# Altium PCB PCB4.PcbDoc (part 3 of 7)
Units mm, origin at the board's own origin, x right, y up, seen from the top; angles counter-clockwise.
Board outline 234.9 x 198.3 mm, 4 copper layers (Top Layer, Signal Layer 2, Mid, Bottom Layer), stack 3.052 mm thick; 410 components, 320 nets, 2032 pads, 297 vias.
Unrouted connection lines stored in the file: 1.
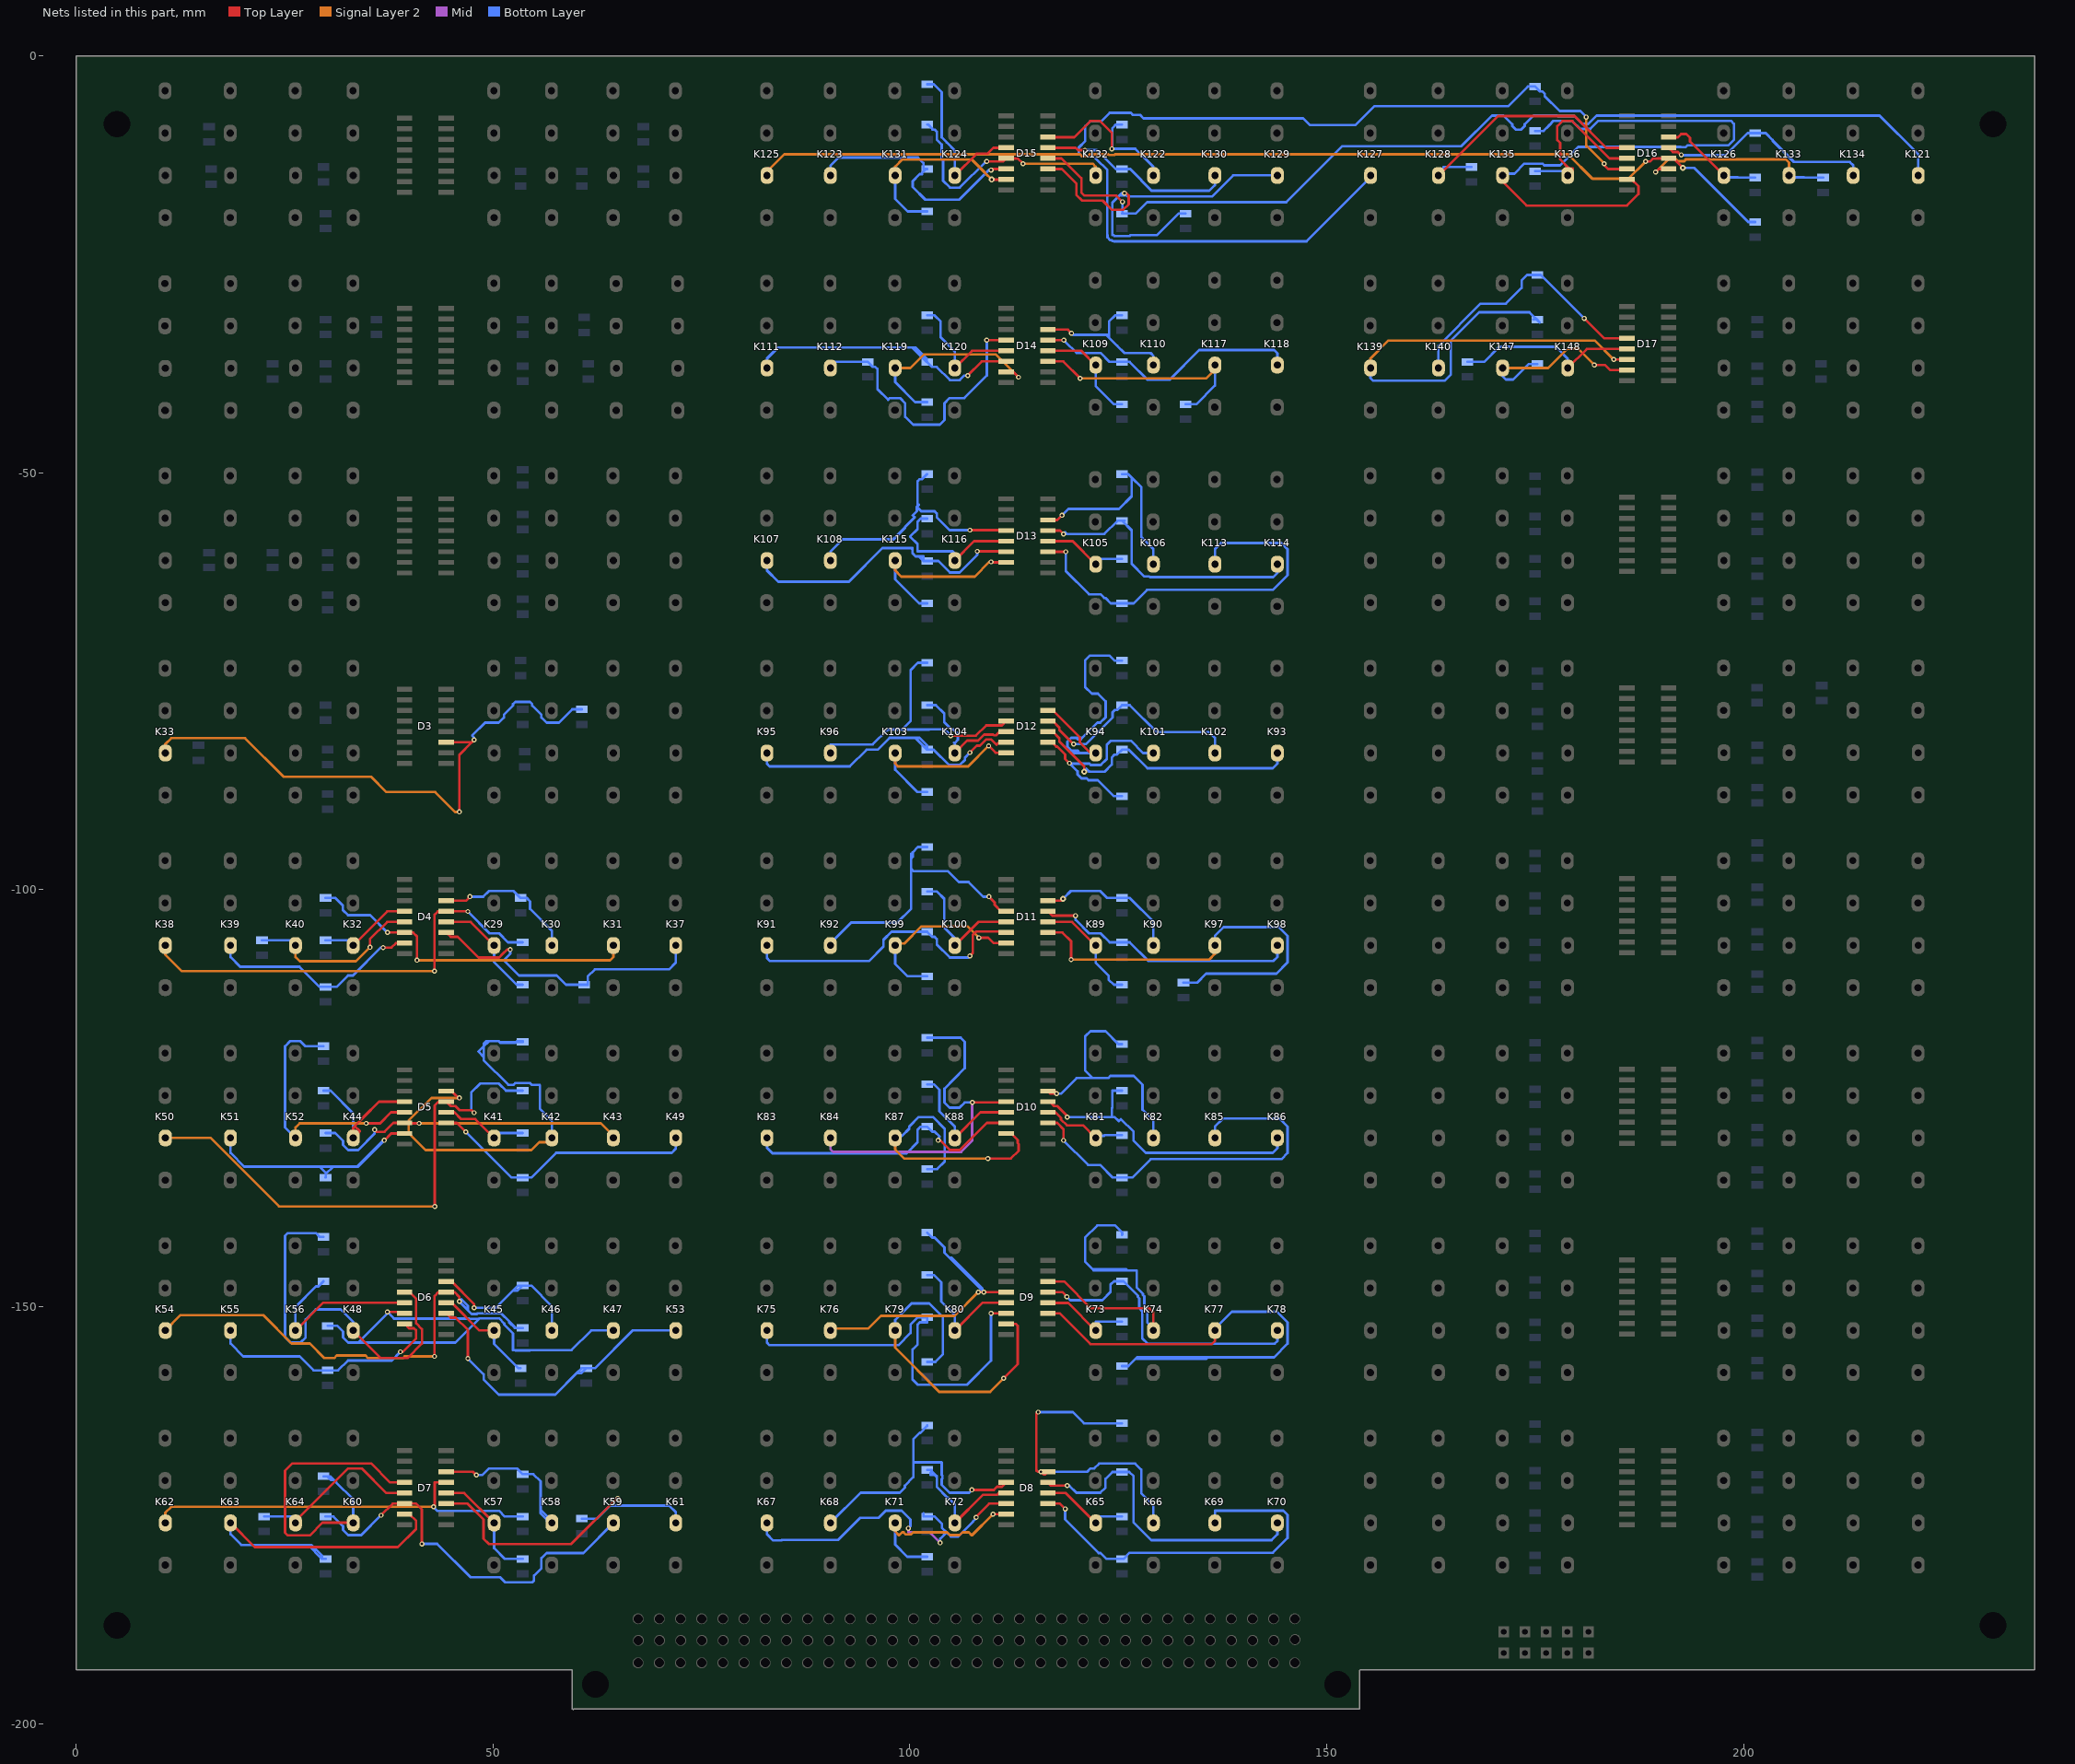
[diagram p5: the nets of this part, all layers, seen from the top]

## Via types
v1: diameter 0.6, hole 0.3, Top Layer to Bottom Layer, 292 vias
v2: diameter 0.7, hole 0.3, Top Layer to Bottom Layer, 5 vias

## Nets (pads, with @x,y where several pads share a name; then routed paths per layer and width w, separated by ;. In a path a pad name is that pad's centre, name@x,y a point inside that pad or via, vN(x,y) a via of type N, cw(c..) or ccw(c..) an arc to the next point about the centre after c; other vN are vias at no path point) (continued)
D3-7: D3.11 K33.3 VD32.A | length 70.5
  Top Layer w0.3: D3.11@44.407,-82.297 47.477,-82.297 ; v1(45.972,-90.66) 45.972,-83.802 47.477,-82.297 ; v1(47.75,-82.024) 47.477,-82.297
  Signal Layer 2 w0.3: K33.3@10.721,-83.592 10.721,-82.528 11.428,-81.821 20.267,-81.821 24.89,-86.444 35.405,-86.444 37.234,-88.273 43.076,-88.273 45.464,-90.66 v1(45.972,-90.66)
  Bottom Layer w0.3: v1(47.75,-82.024) 47.75,-81.759 47.507,-81.516 49.062,-79.962 50.69,-79.962 51.311,-79.341 51.311,-79.016 52.404,-77.924 52.404,-77.724 52.667,-77.461 54.44,-77.461 54.704,-77.724 54.704,-77.924 55.809,-79.029 55.809,-79.341 56.429,-79.962 57.902,-79.962 59.503,-78.36 VD32.A@60.666,-78.361
D4-0: D4.4 K32.3 VD33.A | length 11.8
  Top Layer w0.3: K32.3@33.248,-106.669 37.337,-102.58 D4.4@39.408,-102.58
  Bottom Layer w0.3: VD33.A@29.932,-106.047 33.248,-106.046 K32.3@33.248,-106.669
D4-1: D4.5 K40.3 VD34.A | length 21.9
  Top Layer w0.3: v1(35.253,-106.898) 35.253,-105.907 37.309,-103.85 D4.5@39.408,-103.85
  Signal Layer 2 w0.3: K40.3@26.327,-106.669 26.327,-108.059 26.835,-108.567 33.584,-108.567 v1(35.253,-106.898)
  Bottom Layer w0.3: VD34.A@22.312,-106.047 26.327,-106.046 K40.3@26.327,-106.669
D4-2: D4.6 K31.3 VD35.A | length 41.1
  Top Layer w0.3: v1(37.354,-105.12) D4.6@39.408,-105.12 40.416,-105.12 40.892,-105.596 v1(40.892,-108.44)
  Signal Layer 2 w0.3: v1(40.892,-108.44) 64.054,-108.44 64.435,-108.059 K31.3@64.435,-106.669
  Bottom Layer w0.3: VD35.A@29.932,-100.967 31.094,-100.966 31.996,-101.869 31.996,-102.419 32.617,-103.039 35.273,-103.039 v1(37.354,-105.12)
D4-3: D4.7 K39.3 VD36.A | length 25.9
  Top Layer w0.3: v1(36.828,-106.916) 37.844,-106.916 38.37,-106.39 D4.7@39.408,-106.39
  Bottom Layer w0.3: K39.3@18.531,-106.669 18.531,-108.076 19.683,-109.228 26.801,-109.228 29.208,-111.634 VD36.A@29.932,-111.635 31.257,-111.634 32.617,-110.274 33.216,-110.274 36.574,-106.916 v1(36.828,-106.916)
D4-4: D4.14 K30.3 VD37.A | length 17.4
  Top Layer w0.3: D4.14@44.407,-101.31 46.752,-101.31 v1(47.242,-100.82)
  Bottom Layer w0.3: v1(47.242,-100.82) 48.827,-100.82 49.508,-100.139 52.472,-100.139 VD37.A@53.3,-100.967 54.03,-100.966 54.455,-101.392 54.455,-102.279 57.061,-104.884 K30.3@57.061,-106.669
D4-5: D4.13 K38.3 VD38.A | length 54.8
  Top Layer w0.3: v1(43,-109.761) 43,-102.979 43.399,-102.58 D4.13@44.407,-102.58 46.969,-102.58 v1(46.988,-102.598)
  Signal Layer 2 w0.3: K38.3@10.721,-106.669 10.721,-107.785 12.698,-109.761 v1(43,-109.761)
  Bottom Layer w0.3: v1(46.988,-102.598) 49.608,-105.219 50.73,-105.219 ; VD38.A@53.554,-106.301 51.811,-106.3 ; 50.73,-105.219 51.811,-106.3 ; 50.73,-105.219 51.811,-106.3
D4-6: D4.12 K29.3 VD39.A | length 13.4
  Top Layer w0.3: D4.12@44.407,-103.85 47.32,-103.85 K29.3@50.139,-106.669
  Bottom Layer w0.3: K29.3@50.139,-106.669 50.139,-108.671 52.849,-111.38 VD39.A@53.554,-111.381
D4-7: D4.11 K37.3 VD40.A | length 39.1
  Top Layer w0.3: D4.11@44.407,-105.12 44.927,-105.64 45.783,-105.64 48.261,-108.119 50.73,-108.119 51.159,-107.691 51.679,-107.171 v1(52.068,-107.171)
  Bottom Layer w0.3: v1(52.068,-107.171) 52.068,-107.679 51.371,-108.375 ; K37.3@71.92,-106.669 71.92,-108.731 71.118,-109.533 62.228,-109.533 61.364,-110.396 61.364,-111.38 VD40.A@60.92,-111.381 58.753,-111.38 57.647,-110.274 53.139,-110.274 ; 51.371,-108.506 53.139,-110.274 ; 51.371,-108.506 53.139,-110.274 ; 51.371,-108.506 51.306,-108.44 51.371,-108.375 ; 51.371,-108.506 51.371,-108.375
D5-0: D5.4 K44.3 VD41.A | length 18.4
  Top Layer w0.3: D5.4@39.408,-125.404 37.591,-125.404 36.329,-125.404 34.485,-127.248 33.415,-128.319 ; 33.415,-128.319 33.248,-128.485 K44.3@33.248,-129.747 34.046,-128.95 33.415,-128.319
  Bottom Layer w0.3: VD41.A@29.678,-124.081 30.522,-124.08 33.248,-126.807 K44.3@33.248,-129.747
D5-1: D5.5 K52.3 VD42.A | length 31.7
  Top Layer w0.3: v1(34.796,-127.998) 36.468,-127.998 37.793,-126.674 D5.5@39.408,-126.674
  Signal Layer 2 w0.3: K52.3@26.327,-129.747 26.327,-128.492 26.82,-127.998 v1(34.796,-127.998)
  Bottom Layer w0.3: K52.3@26.327,-129.747 25.075,-128.495 25.075,-118.758 25.695,-118.137 26.878,-118.137 27.487,-118.746 VD42.A@29.678,-118.747
D5-2: D5.6 K43.3 VD43.A | length 38.3
  Top Layer w0.3: v1(35.812,-128.761) 36.066,-129.014 36.995,-129.014 38.065,-127.944 D5.6@39.408,-127.944 39.462,-127.999 v1(41.146,-127.999)
  Signal Layer 2 w0.3: v1(41.146,-127.999) 62.936,-127.998 64.435,-129.497 K43.3@64.435,-129.747
  Bottom Layer w0.3: VD43.A@29.932,-129.161 31.094,-129.16 32.036,-130.103 32.036,-130.576 32.657,-131.197 33.839,-131.197 35.812,-129.225 v1(35.812,-128.761)
D5-3: D5.7 K51.3 VD44.A | length 32.4
  Top Layer w0.3: v1(36.979,-130.03) 37.795,-129.214 D5.7@39.408,-129.214
  Bottom Layer w0.3: K51.3@18.531,-129.747 18.531,-131.554 20.157,-133.18 29.208,-133.18 ; VD44.A@29.932,-134.495 29.944,-134.494 VD44.A@29.944,-134.094 ; v1@36.828,-130.03 33.678,-133.18 ; v1(36.979,-130.03) 33.829,-133.18 33.678,-133.18 ; 29.208,-133.18 29.944,-133.917 VD44.A@29.944,-134.094 ; 29.208,-133.18 30.859,-133.18 ; VD44.A@29.944,-134.094 30.859,-133.18 ; 30.859,-133.18 33.678,-133.18
D5-4: D5.14 K42.3 VD45.A | length 57.2
  Top Layer w0.3: D5.14@44.407,-124.134 45.032,-124.134 45.972,-125.074 v1(45.972,-124.95)
  Signal Layer 2 w0.3: v1(45.972,-124.95) 42.619,-124.95 39.888,-127.682 39.888,-129.179 41.908,-131.199 54.608,-131.199 55.547,-130.259 57.061,-130.259 K42.3@57.061,-129.747
  Bottom Layer w0.3: K42.3@57.061,-129.747 57.061,-127.658 55.624,-126.22 55.624,-123.427 55.577,-123.38 54.64,-123.38 54.44,-123.181 52.667,-123.181 52.467,-123.38 51.851,-123.38 48.887,-120.416 48.887,-120.017 ; 48.887,-120.017 48.258,-119.387 48.887,-118.758 ; 48.887,-120.017 48.887,-118.758 ; 48.887,-118.758 48.887,-118.46 49.21,-118.137 49.508,-118.137 ; 48.887,-118.758 49.508,-118.137 ; 49.508,-118.137 50.69,-118.137 50.792,-118.238 ; 50.792,-118.238 50.923,-118.37 52.685,-118.37 52.816,-118.238 ; 50.792,-118.238 52.816,-118.238 ; 52.816,-118.238 52.916,-118.138 53.554,-118.138 VD45.A@53.554,-118.239 52.816,-118.238
D5-5: D5.13 K50.3 VD46.A | length 62.9
  Top Layer w0.3: v1(43.025,-137.955) 43.025,-125.839 43.461,-125.404 D5.13@44.407,-125.404 44.927,-125.924 45.519,-125.924 45.972,-126.377 45.972,-126.412 47.433,-126.412 v1(47.75,-126.728)
  Signal Layer 2 w0.3: K50.3@10.721,-129.747 10.721,-129.726 16.101,-129.726 24.331,-137.955 v1(43.025,-137.955)
  Bottom Layer w0.3: v1(47.75,-126.728) 47.398,-126.377 47.398,-124.286 48.467,-123.217 50.69,-123.217 51.554,-124.08 VD46.A@53.554,-124.081
D5-6: D5.12 K41.3 VD47.A | length 11
  Top Layer w0.3: D5.12@44.407,-126.674 45.385,-126.674 46.19,-127.479 47.87,-127.479 K41.3@50.139,-129.747
  Bottom Layer w0.3: K41.3@50.139,-129.747 50.139,-129.16 VD47.A@53.554,-129.161
D5-7: D5.11 K49.3 VD48.A | length 33
  Top Layer w0.3: D5.11@44.407,-127.944 45.663,-127.944 v1(46.734,-129.014)
  Bottom Layer w0.3: v1(46.734,-129.014) 52.214,-134.494 VD48.A@53.554,-134.495 54.608,-134.494 57.573,-131.529 71.435,-131.529 71.92,-131.045 K49.3@71.92,-129.747
D6-0: D6.4 K48.3 VD49.A | length 47.8
  Top Layer w0.3: K48.3@33.248,-152.825 36.561,-156.137 39.763,-156.137 41.492,-154.409 41.492,-152.682 40.783,-151.973 40.783,-149.011 39.999,-148.228 D6.4@39.408,-148.228
  Bottom Layer w0.3: VD49.A@29.678,-141.607 29.233,-141.606 28.782,-141.156 25.398,-141.156 25.067,-141.486 25.067,-153.607 25.735,-154.275 26.918,-154.275 27.539,-153.654 27.539,-151.511 28.75,-150.3 31.748,-150.3 33.248,-151.8 K48.3@33.248,-152.825
D6-1: D6.5 K56.3 VD50.A | length 21.9
  Top Layer w0.3: K56.3@26.327,-152.825 29.654,-149.498 D6.5@39.408,-149.498
  Bottom Layer w0.3: K56.3@26.327,-152.825 26.327,-150.005 28.791,-147.54 29.078,-147.54 VD50.A@29.678,-146.941
D6-2: D6.6 K47.3 VD51.A | length 68.3
  Top Layer w0.3: v1(37.336,-150.604) 39.244,-150.604 D6.6@39.408,-150.768
  Bottom Layer w0.3: VD51.A@30.186,-152.275 31.348,-152.274 32.036,-152.963 32.036,-153.654 32.657,-154.275 33.839,-154.275 ; K47.3@64.435,-152.825 61.785,-152.825 59.434,-155.176 54.492,-155.176 54.44,-155.229 52.667,-155.229 52.615,-155.176 52.403,-155.176 52.403,-153.181 51.351,-152.128 51.351,-151.995 50.73,-151.375 48.38,-151.375 ; 33.839,-154.275 37.336,-150.779 v1(37.336,-150.604) 38.098,-151.366 ; 33.839,-154.275 45.48,-154.275 48.309,-151.447 ; 38.098,-151.366 47.11,-151.366 47.19,-151.447 ; 38.098,-151.366 38.178,-151.447 47.19,-151.447 ; 47.19,-151.447 48.309,-151.447 ; 48.309,-151.447 48.38,-151.375 ; 48.309,-151.447 48.38,-151.375
D6-3: D6.7 K55.3 VD52.A | length 29.4
  Top Layer w0.3: v1(38.903,-155.387) 39.189,-155.387 40.783,-153.794 40.783,-152.821 40.519,-152.558 39.927,-152.558 D6.7@39.408,-152.038
  Bottom Layer w0.3: K55.3@18.531,-152.825 18.531,-154.414 20.055,-155.938 26.826,-155.938 28.496,-157.608 VD52.A@30.186,-157.609 31.438,-157.608 32.617,-156.43 37.86,-156.43 v1(38.903,-155.387)
D6-4: D6.14 K46.3 VD53.A | length 23.5
  Top Layer w0.3: D6.14@44.407,-146.958 45.032,-146.958 47.75,-149.675 v1(47.75,-150.096)
  Bottom Layer w0.3: v1(47.75,-150.096) 50.356,-150.096 ; K46.3@57.061,-152.825 57.061,-149.901 54.608,-147.448 VD53.A@53.554,-147.449 ; 50.356,-150.096 52.404,-148.048 ; 50.356,-150.096 52.404,-148.048 ; 52.404,-148.048 52.954,-148.048 VD53.A@53.554,-147.449 ; 52.404,-148.048 53.004,-147.448 VD53.A@53.554,-147.449
D6-5: D6.13 K54.3 VD54.A | length 59.5
  Top Layer w0.3: v1(43,-155.938) 43,-148.699 43.471,-148.228 D6.13@44.407,-148.228 45.373,-148.228 45.972,-148.826 v1(45.972,-149.334)
  Signal Layer 2 w0.3: K54.3@10.721,-152.825 10.721,-152.814 12.55,-150.985 22.446,-150.985 25.853,-154.393 28.047,-154.393 29.792,-156.137 30.954,-156.137 31.262,-155.83 34.709,-155.83 35.016,-156.137 39.213,-156.137 39.412,-155.938 v1(43,-155.938)
  Bottom Layer w0.3: VD54.A@53.554,-152.529 52.733,-152.528 ; 47.439,-150.847 47,-150.407 47,-149.854 46.226,-149.08 v1(45.972,-149.334) 45.972,-149.379 47.439,-150.847 ; 47.439,-150.847 48.06,-150.847 48.132,-150.775 50.979,-150.775 51.951,-151.747 ; 51.951,-151.747 51.951,-151.88 52.6,-152.528 52.733,-152.528 ; 51.951,-151.747 52.733,-152.528
D6-6: D6.12 K45.3 VD55.A | length 13.1
  Top Layer w0.3: D6.12@44.407,-149.498 45.032,-149.498 48.359,-152.825 K45.3@50.139,-152.825
  Bottom Layer w0.3: K45.3@50.139,-152.825 50.139,-154.452 53.041,-157.354 VD55.A@53.3,-157.355
D6-7: D6.11 K53.3 VD56.A | length 38.5
  Top Layer w0.3: D6.11@44.407,-150.768 44.927,-151.288 45.519,-151.288 46.988,-152.756 v1(46.988,-156.192)
  Bottom Layer w0.3: v1(46.988,-156.192) 48.887,-158.092 48.887,-158.709 50.689,-160.511 57.467,-160.511 60.023,-157.954 ; K53.3@71.92,-152.825 71.92,-152.814 66.774,-152.814 62.234,-157.354 VD56.A@61.174,-157.355 ; 60.023,-157.954 60.573,-157.954 VD56.A@61.174,-157.355 ; 60.023,-157.954 60.623,-157.354 VD56.A@61.174,-157.355
D7-0: D7.4 K60.3 VD57.A | length 40.5
  Top Layer w0.3: K60.3@33.248,-175.902 33.248,-175.877 29.563,-175.877 28.039,-177.401 25.398,-177.401 25.067,-177.071 25.067,-169.654 25.956,-168.765 35.38,-168.765 37.666,-171.051 D7.4@39.408,-171.051
  Bottom Layer w0.3: VD57.A@29.678,-170.309 VD57.A@30.227,-170.308 ; K60.3@33.248,-175.902 33.248,-174.546 33.248,-173.079 31.214,-171.045 30.932,-170.762 ; VD57.A@30.227,-170.308 30.227,-170.411 30.579,-170.762 30.932,-170.762 ; VD57.A@30.227,-170.308 30.478,-170.308 30.932,-170.762
D7-1: D7.5 K64.3 VD58.A | length 21.7
  Top Layer w0.3: K64.3@26.327,-175.902 26.327,-175.663 32.617,-169.373 34.259,-169.373 37.209,-172.321 D7.5@39.408,-172.321
  Bottom Layer w0.3: VD58.A@22.566,-175.135 24.356,-175.134 24.375,-175.115 26.327,-175.115 K64.3@26.327,-175.902
D7-2: D7.6 K59.3 VD59.A | length 47.6
  Top Layer w0.3: v1(36.574,-174.988) 37.971,-173.591 D7.6@39.408,-173.591 40.783,-173.591 41.476,-174.285 v1(41.476,-178.417)
  Bottom Layer w0.3: VD59.A@29.932,-175.135 30.878,-175.134 32.036,-176.293 32.036,-176.732 32.657,-177.352 34.21,-177.352 v1(36.574,-174.988) ; v1(41.476,-178.417) 43.305,-178.417 47.3,-182.413 50.73,-182.413 50.856,-182.413 51.468,-183.025 54.7,-183.025 54.925,-182.799 54.925,-182.214 55.809,-181.331 55.809,-180.128 56.429,-179.508 60.83,-179.508 K59.3@64.435,-175.902
D7-3: D7.7 K63.3 VD60.A | length 43.6
  Top Layer w0.3: K63.3@18.531,-175.902 21.427,-178.798 38.602,-178.798 40.783,-176.618 40.783,-175.645 39.999,-174.861 D7.7@39.408,-174.861
  Bottom Layer w0.3: K63.3@18.531,-175.902 18.531,-177.274 19.801,-178.544 27.817,-178.544 ; VD60.A@29.932,-180.215 VD60.A@29.487,-180.214 ; 27.817,-178.544 VD60.A@29.487,-180.214 ; 27.817,-178.544 28.217,-178.544 29.487,-179.814 VD60.A@29.487,-180.214
D7-4: D7.14 K58.3 VD61.A | length 20.2
  Top Layer w0.3: D7.14@44.407,-169.781 47.623,-169.781 v1(48.004,-170.162)
  Bottom Layer w0.3: v1(48.004,-170.162) 48.718,-170.162 49.508,-169.373 52.871,-169.373 VD61.A@53.554,-170.055 54.855,-170.054 55.725,-170.924 55.725,-174.339 ; K58.3@57.061,-175.902 K58.3@57.061,-175.674 ; 55.725,-174.339 K58.3@57.061,-175.674 ; 55.725,-174.339 55.725,-174.75 56.449,-175.473 56.449,-175.674 K58.3@57.061,-175.674
D7-5: D7.13 K62.3 VD62.A | length 49.2
  Top Layer w0.3: v1(42.873,-173.972) 43.025,-173.82 43.025,-171.051 D7.13@44.407,-171.051
  Signal Layer 2 w0.3: K62.3@10.721,-175.902 10.721,-174.679 11.428,-173.972 v1(42.873,-173.972)
  Bottom Layer w0.3: v1(42.873,-173.972) 43.369,-174.469 47.044,-174.469 47.06,-174.453 50.73,-174.453 51.412,-175.134 VD62.A@53.554,-175.135
D7-6: D7.12 K57.3 VD63.A | length 14.2
  Top Layer w0.3: D7.12@44.407,-172.321 46.558,-172.321 K57.3@50.139,-175.902
  Bottom Layer w0.3: K57.3@50.139,-175.902 50.139,-178.921 51.433,-180.214 VD63.A@53.554,-180.215
D7-7: D7.11 K61.3 VD64.A | length 43.2
  Top Layer w0.3: D7.11@44.407,-173.591 46.962,-173.591 48.867,-175.496 48.867,-177.782 49.528,-178.443 59.383,-178.443 64.869,-172.957 v1(64.971,-172.957)
  Bottom Layer w0.3: VD64.A@60.666,-175.389 62.437,-175.388 ; v1(64.971,-172.957) 64.869,-172.957 62.437,-175.388 ; K61.3@71.92,-175.902 71.92,-174.622 71.118,-173.82 64.05,-173.82 62.482,-175.388 62.437,-175.388
D8-0: D8.4 K68.3 VD65.A | length 34.1
  Top Layer w0.3: v1(107.44,-171.94) 110.063,-171.94 110.432,-171.571 111.023,-171.571 D8.4@111.543,-171.051
  Bottom Layer w0.3: K68.3@90.462,-175.902 94.092,-172.272 98.774,-172.272 99.395,-171.652 99.395,-171.433 100.404,-170.424 100.404,-168.638 ; VD65.A@102.068,-164.213 102.068,-164.297 101.252,-165.113 101.181,-165.113 100.404,-165.89 100.404,-168.638 ; v1(107.44,-171.94) 107.108,-172.272 104.753,-172.272 103.818,-171.337 103.818,-170.659 103.88,-170.597 103.88,-170.224 103.818,-170.162 103.818,-168.638 100.404,-168.638
D8-1: D8.5 K72.3 VD66.A | length 17.3
  Top Layer w0.3: K72.3@105.384,-175.902 108.746,-172.54 110.417,-172.54 110.636,-172.321 D8.5@111.543,-172.321
  Bottom Layer w0.3: VD66.A@102.068,-169.547 VD66.A@102.477,-169.546 ; K72.3@105.384,-175.902 105.384,-173.668 104.589,-172.872 104.504,-172.872 103.218,-171.586 103.218,-170.41 ; VD66.A@102.477,-169.546 VD66.A@102.618,-169.687 ; VD66.A@102.477,-169.546 102.618,-169.546 VD66.A@102.618,-169.687 ; VD66.A@102.618,-169.687 103.218,-170.287 103.218,-170.41 ; VD66.A@102.618,-169.687 102.618,-169.734 102.477,-169.875 102.477,-170.146 102.954,-170.146 103.218,-170.41
D8-2: D8.6 K67.3 VD67.A | length 41.6
  Top Layer w0.3: v1@107.948,-175.38 v1(107.948,-175.243) ; v1@107.948,-175.152 109.509,-173.591 D8.6@111.543,-173.591
  Mid w0.3: v1(99.82,-176.539) 99.82,-177.021 102.36,-177.021 v1(103.63,-178.291)
  Bottom Layer w0.3: K67.3@82.857,-175.902 82.857,-177.274 83.568,-177.986 84.61,-177.986 ; 84.661,-177.935 91.412,-177.935 94.054,-175.293 96.238,-175.293 97.102,-174.43 99.007,-174.43 100.058,-175.481 100.058,-176.269 100.074,-176.285 v1(99.82,-176.539) ; VD67.A@101.623,-174.773 101.623,-175.134 102.963,-175.134 103.833,-176.004 103.833,-176.462 104.392,-177.02 ; v1(103.63,-178.291) 103.63,-177.783 104.392,-177.02 ; v1(107.948,-175.243) 107.948,-175.353 107.577,-175.723 107.577,-175.751 105.799,-177.528 104.9,-177.528 104.392,-177.02
D8-3: D8.7 K71.3 VD68.A | length 23.4
  Top Layer w0.3: v1(109.954,-174.861) D8.7@111.543,-174.861
  Signal Layer 2 w0.3: K71.3@98.223,-175.902 98.223,-176.923 98.689,-177.388 99.056,-177.021 99.241,-177.021 99.509,-177.289 100.13,-177.289 100.398,-177.021 104.461,-177.021 104.793,-177.352 105.975,-177.352 106.307,-177.021 107.06,-177.021 107.428,-177.388 v1(109.954,-174.861)
  Bottom Layer w0.3: K71.3@98.223,-175.902 98.223,-178.491 99.693,-179.96 VD68.A@102.068,-179.961
D8-4: D8.14 K66.3 VD69.A | length 39.9
  Top Layer w0.3: v1(115.364,-162.619) 115.161,-162.822 115.161,-169.604 115.339,-169.781 v1(115.719,-169.781) ; v1(115.719,-169.781) D8.14@116.543,-169.781 116.243,-170.082 116.02,-170.082 v1(115.719,-169.781)
  Bottom Layer w0.3: v1(115.364,-162.619) 119.536,-162.619 120.876,-163.958 VD69.A@125.435,-163.959 ; v1(115.719,-169.781) 121.235,-169.781 121.644,-169.373 122.098,-169.373 122.68,-168.791 126.998,-168.791 127.734,-169.527 127.734,-172.358 129.197,-173.82 K66.3@129.197,-175.902
D8-5: D8.13 K70.3 VD70.A | length 39.1
  Top Layer w0.3: D8.13@116.543,-171.051 116.924,-171.432 v1(118.87,-171.432)
  Bottom Layer w0.3: v1(118.87,-171.432) 119.124,-171.432 119.964,-172.272 122.826,-172.272 123.447,-171.652 123.447,-170.627 ; K70.3@144.056,-175.902 144.056,-177.274 143.37,-177.96 128.928,-177.96 126.82,-175.852 126.82,-170.315 126.305,-169.8 VD70.A@125.436,-169.801 124.273,-169.8 ; 123.447,-170.627 124.273,-169.8 ; 123.447,-170.627 124.273,-169.8
D8-6: D8.12 K65.3 VD71.A | length 11.2
  Top Layer w0.3: D8.12@116.543,-172.321 118.694,-172.321 K65.3@122.275,-175.902
  Bottom Layer w0.3: K65.3@122.275,-175.902 122.275,-175.115 123.854,-175.115 123.873,-175.134 VD71.A@125.436,-175.135
D8-7: D8.11 K69.3 VD72.A | length 46.4
  Top Layer w0.3: D8.11@116.543,-173.591 117.981,-173.591 v1(118.616,-174.226)
  Bottom Layer w0.3: v1(118.616,-174.226) 118.616,-175.497 122.627,-179.507 122.861,-179.507 123.568,-180.214 125.632,-180.214 126.363,-179.484 143.508,-179.484 145.286,-177.706 145.286,-174.938 144.778,-174.43 136.571,-174.43 K69.3@136.571,-175.902
D9-0: D9.4 K76.3 VD73.A | length 39.2
  Top Layer w0.3: v1(108.202,-148.228) v1(108.866,-148.228) D9.4@111.543,-148.228
  Signal Layer 2 w0.3: K76.3@90.462,-152.825 90.462,-152.586 95.019,-152.586 96.518,-151.087 105.342,-151.087 v1(108.202,-148.228)
  Bottom Layer w0.3: K76.3@90.462,-152.825 K76.3@90.462,-152.586 ; VD73.A@102.068,-141.099 102.668,-141.698 102.954,-141.698 104.132,-142.877 104.132,-143.494 104.753,-144.115 ; v1@108.71,-148.064 108.71,-147.81 105.014,-144.115 104.753,-144.115 ; v1(108.866,-148.228) 104.753,-144.115
D9-1: D9.5 K80.3 VD74.A | length 16
  Top Layer w0.3: K80.3@105.384,-152.825 108.711,-149.498 D9.5@111.543,-149.498
  Bottom Layer w0.3: VD74.A@102.067,-146.179 102.868,-146.178 103.757,-147.067 103.757,-149.358 105.384,-150.985 K80.3@105.384,-152.825
D9-2: D9.6 K75.3 VD75.A | length 50
  Top Layer w0.3: v1(109.726,-150.768) D9.6@111.543,-150.768
  Bottom Layer w0.3: K75.3@82.857,-152.825 82.857,-154.267 83.183,-154.592 98.626,-154.592 100.074,-153.144 100.074,-152.147 100.963,-151.258 VD75.A@102.068,-151.259 102.068,-151.858 101.181,-151.858 100.918,-152.122 100.918,-154.491 100.318,-155.091 100.318,-158.723 100.93,-159.335 106.837,-159.335 109.726,-156.446 v1(109.726,-150.768) v1@109.726,-150.604
D9-3: D9.7 K79.3 VD76.A | length 41.6
  Top Layer w0.3: v1(111.25,-158.555) 112.918,-156.886 112.918,-152.275 112.682,-152.038 D9.7@111.543,-152.038
  Signal Layer 2 w0.3: K79.3@98.223,-152.825 98.223,-154.897 103.506,-160.18 109.624,-160.18 v1(111.25,-158.555)
  Bottom Layer w0.3: K79.3@98.223,-152.825 98.223,-151.557 100.192,-149.589 102.309,-149.589 103.96,-151.239 103.96,-155.684 103.052,-156.592 VD76.A@102.068,-156.593
D9-4: D9.14 K74.3 VD77.A | length 43.8
  Top Layer w0.3: D9.14@116.543,-146.958 118.5,-146.958 121.714,-150.173 128.725,-150.173 129.197,-150.645 K74.3@129.197,-152.825
  Bottom Layer w0.3: VD77.A@125.435,-141.353 125.448,-141.352 125.448,-141.079 124.61,-140.241 122.476,-140.241 121.003,-141.714 121.003,-144.585 121.918,-145.499 ; K74.3@129.197,-152.825 129.197,-152.586 128.461,-151.85 128.461,-150.254 128.106,-149.899 128.106,-148.735 127.945,-148.574 127.945,-148.417 127.185,-147.658 127.185,-145.64 126.072,-145.64 ; 121.918,-145.499 125.931,-145.499 126.072,-145.64 ; 121.918,-145.499 122.059,-145.64 126.072,-145.64
D9-5: D9.13 K78.3 VD78.A | length 36.5
  Top Layer w0.3: D9.13@116.543,-148.228 118.271,-148.228 v1(118.826,-148.783)
  Bottom Layer w0.3: v1(118.826,-148.783) 119.238,-149.195 123.073,-149.195 124.051,-148.217 124.051,-147.347 124.458,-146.94 VD78.A@125.436,-146.941 125.62,-146.941 127.345,-148.666 127.345,-148.823 127.506,-148.984 127.506,-150.147 127.861,-150.503 127.861,-153.779 128.496,-154.414 143.738,-154.414 144.056,-154.097 K78.3@144.056,-152.825
D9-6: D9.12 K73.3 VD79.A | length 11.3
  Top Layer w0.3: D9.12@116.543,-149.498 116.579,-149.533 118.984,-149.533 K73.3@122.275,-152.825
  Bottom Layer w0.3: K73.3@122.275,-152.825 122.275,-151.766 VD79.A@125.435,-151.767
D9-7: D9.11 K77.3 VD80.A | length 65.5
  Top Layer w0.3: D9.11@116.543,-150.768 117.93,-150.768 121.63,-154.468 136.205,-154.468 136.571,-154.102 K77.3@136.571,-152.825
  Bottom Layer w0.3: VD80.A@125.436,-157.101 126.191,-157.1 127.074,-156.218 ; K77.3@136.571,-152.825 136.571,-152.611 138.603,-150.579 143.99,-150.579 145.286,-151.874 145.286,-154.414 143.66,-156.04 135.735,-156.04 ; 127.074,-156.218 135.557,-156.218 135.735,-156.04 ; 127.074,-156.218 127.252,-156.04 135.735,-156.04
D10-0: D10.4 K84.3 VD81.A | length 44.6
  Top Layer w0.3: v1(107.477,-125.496) 111.451,-125.496 D10.4@111.543,-125.404
  Mid w0.3: K84.3@90.462,-129.747 90.462,-131.087 90.803,-131.427 106.144,-131.427 107.465,-130.107 v1@107.465,-125.509
  Bottom Layer w0.3: VD81.A@102.068,-117.731 106.087,-117.73 106.576,-118.219 106.576,-121.394 105.305,-122.664 104.132,-123.838 104.132,-125.496 104.753,-126.117 105.935,-126.117 106.556,-125.496 v1(107.477,-125.496)
D10-1: D10.5 K88.3 VD82.A | length 15.7
  Top Layer w0.3: K88.3@105.384,-129.747 108.457,-126.674 D10.5@111.543,-126.674
  Bottom Layer w0.3: VD82.A@102.067,-123.319 102.868,-123.318 103.532,-123.983 103.532,-126.553 105.384,-128.405 K88.3@105.384,-129.747
D10-2: D10.6 K83.3 VD83.A | length 35.4
  Top Layer w0.3: v1(103.376,-130.031) 103.626,-130.031 103.753,-130.157 104.793,-131.197 105.975,-131.197 109.228,-127.944 D10.6@111.543,-127.944
  Bottom Layer w0.3: K83.3@82.857,-129.747 82.857,-130.919 83.518,-131.58 99.616,-131.58 100.912,-130.284 100.912,-128.767 101.28,-128.398 VD83.A@102.068,-128.399 102.668,-128.998 102.954,-128.998 103.572,-129.617 103.376,-129.813 v1(103.376,-130.031)
D10-3: D10.7 K87.3 VD84.A | length 34.4
  Top Layer w0.3: v1(109.345,-132.215) 112.113,-132.215 113.028,-131.3 113.028,-130.484 112.918,-130.375 112.918,-129.998 112.135,-129.214 D10.7@111.543,-129.214
  Signal Layer 2 w0.3: K87.3@98.223,-129.747 98.223,-131.141 99.296,-132.215 v1(109.345,-132.215)
  Bottom Layer w0.3: K87.3@98.223,-129.747 98.223,-129.497 99.058,-129.497 99.921,-128.633 99.921,-128.379 101.064,-127.237 102.766,-127.237 104.172,-128.643 104.172,-128.918 104.172,-130.576 104.172,-132.587 103.28,-133.478 VD84.A@102.068,-133.479
D10-4: D10.14 K82.3 VD85.A | length 31.3
  Top Layer w0.3: D10.14@117.396,-124.134 D10.14@116.543,-124.134 116.852,-124.443 v1(117.6,-124.443)
  Bottom Layer w0.3: v1(117.6,-124.443) 118.108,-124.442 119.987,-122.563 121.918,-122.563 ; VD85.A@125.436,-118.493 124.991,-118.492 123.448,-116.949 121.638,-116.949 121.003,-117.584 121.003,-121.648 121.918,-122.563 ; K82.3@129.197,-129.747 129.197,-127.668 127.887,-126.358 127.887,-123.365 126.84,-122.319 124.031,-122.319 123.787,-122.563 121.918,-122.563
D10-5: D10.13 K86.3 VD86.A | length 36.7
  Top Layer w0.3: D10.13@116.543,-125.404 116.784,-125.404 117.304,-125.924 117.655,-125.924 118.87,-127.139 v1(118.87,-127.237)
  Bottom Layer w0.3: v1(118.87,-127.237) 124.204,-127.237 ; VD86.A@125.436,-124.081 124.28,-124.08 124.28,-126.093 124.204,-126.17 124.204,-127.237 ; K86.3@144.056,-129.747 144.056,-130.981 143.508,-131.529 128.268,-131.529 126.82,-130.081 126.82,-129.012 125.298,-127.49 125.044,-127.745 124.536,-127.237 124.204,-127.237
D10-6: D10.12 K81.3 VD87.A | length 10.6
  Top Layer w0.3: D10.12@116.543,-126.674 117.442,-126.674 118.12,-127.352 118.12,-127.547 118.813,-128.241 120.768,-128.241 K81.3@122.275,-129.747
  Bottom Layer w0.3: K81.3@122.275,-129.747 122.275,-129.497 123.283,-129.497 123.365,-129.414 VD87.A@125.435,-129.415
D10-7: D10.11 K85.3 VD88.A | length 47.5
  Top Layer w0.3: D10.11@116.543,-127.944 117.668,-127.944 118.409,-128.685 v1(118.409,-130.039)
  Bottom Layer w0.3: v1(118.409,-130.039) 121.358,-132.989 122.818,-132.989 124.324,-134.494 124.981,-134.494 VD88.A@125.436,-134.495 126.674,-134.494 128.877,-132.291 144.549,-132.291 145.286,-131.554 145.286,-128.379 144.32,-127.414 137.536,-127.414 136.571,-128.379 K85.3@136.571,-129.747
D11-0: D11.4 K92.3 VD89.A | length 35
  Top Layer w0.3: v1(109.471,-100.82) 110.168,-101.517 110.168,-101.797 110.952,-102.58 D11.4@111.543,-102.58
  Bottom Layer w0.3: K92.3@90.462,-106.669 90.462,-106.434 92.963,-103.932 98.486,-103.932 100.15,-102.268 100.15,-98.789 100.15,-97.457 ; VD89.A@102.068,-94.871 100.963,-94.87 100.328,-95.505 ; v1(109.471,-100.82) 108.796,-100.82 107.028,-99.052 105.846,-99.052 104.566,-97.773 100.466,-97.773 100.15,-97.457 ; 100.15,-97.457 100.15,-96.223 ; 100.15,-96.223 100.328,-96.045 100.328,-95.505 ; 100.15,-96.223 100.15,-95.683 100.328,-95.505
D11-1: D11.5 K100.3 VD90.A | length 15.9
  Top Layer w0.3: K100.3@105.384,-106.669 108.203,-103.85 D11.5@111.543,-103.85
  Bottom Layer w0.3: VD90.A@102.068,-100.205 103.242,-100.204 104.112,-101.074 104.112,-104.527 105.384,-105.799 K100.3@105.384,-106.669
D11-2: D11.6 K91.3 VD91.A | length 36.5
  Top Layer w0.3: v1(107.186,-107.932) 107.528,-107.59 107.528,-105.437 107.967,-104.998 111.421,-104.998 D11.6@111.543,-105.12
  Bottom Layer w0.3: K91.3@82.857,-106.669 82.857,-108.191 83.183,-108.517 95.121,-108.517 96.822,-106.815 96.822,-105.996 97.788,-105.03 VD91.A@102.068,-105.031 102.668,-105.63 102.954,-105.63 103.218,-105.894 103.218,-106.544 104.793,-108.119 106.999,-108.119 v1(107.186,-107.932)
D11-3: D11.7 K99.3 VD92.A | length 21.9
  Top Layer w0.3: v1(108.278,-105.748) 109.388,-105.748 110.03,-106.39 D11.7@111.543,-106.39
  Signal Layer 2 w0.3: K99.3@98.223,-106.669 98.223,-106.434 99.337,-106.434 101.394,-104.376 106.906,-104.376 v1(108.278,-105.748)
  Bottom Layer w0.3: K99.3@98.223,-106.669 98.223,-108.87 99.718,-110.364 VD92.A@102.068,-110.365
D11-4: D11.14 K90.3 VD93.A | length 17.6
  Top Layer w0.3: D11.14@116.543,-101.31 118.126,-101.31 v2(118.362,-101.075)
  Bottom Layer w0.3: v2@118.489,-101.202 118.489,-100.948 119.297,-100.139 122.826,-100.139 123.653,-100.966 VD93.A@125.435,-100.967 126.363,-100.966 129.197,-103.801 K90.3@129.197,-106.669
D11-5: D11.13 K98.3 VD94.A | length 31.8
  Top Layer w0.3: D11.13@116.543,-102.58 117.063,-103.1 v1(119.861,-103.1)
  Bottom Layer w0.3: v1(119.861,-103.1) 119.861,-103.59 121.49,-105.219 122.866,-105.219 123.947,-106.3 VD94.A@125.436,-106.301 126.363,-106.3 128.579,-108.517 143.598,-108.517 144.056,-108.059 K98.3@144.056,-106.669
D11-6: D11.12 K89.3 VD95.A | length 13.5
  Top Layer w0.3: D11.12@116.543,-103.85 119.456,-103.85 K89.3@122.275,-106.669
  Bottom Layer w0.3: K89.3@122.275,-106.669 122.275,-108.745 123.823,-110.293 123.823,-110.745 124.458,-111.38 VD95.A@125.436,-111.381
D11-7: D11.11 K97.3 VD96.A | length 51.4
  Top Layer w0.3: D11.11@116.543,-105.12 118.293,-105.12 119.327,-106.154 v1(119.327,-108.364)
  Signal Layer 2 w0.3: v1(119.327,-108.364) 135.888,-108.364 136.571,-107.681 K97.3@136.571,-106.669
  Bottom Layer w0.3: VD96.A@132.802,-111.127 134.44,-111.126 135.526,-110.041 143.939,-110.041 145.286,-108.694 145.286,-105.519 144.244,-104.478 137.612,-104.478 136.571,-105.519 K97.3@136.571,-106.669
D12-0: D12.4 K96.3 VD97.A | length 33.8
  Top Layer w0.3: v1(104.9,-81.516) 107.908,-81.516 109.147,-80.277 111.023,-80.277 D12.4@111.543,-79.757
  Bottom Layer w0.3: K96.3@90.462,-83.592 90.462,-82.569 95.542,-82.569 97.33,-80.78 99.058,-80.78 ; VD97.A@102.068,-72.773 100.963,-72.772 100.099,-73.636 100.099,-79.739 99.058,-80.78 ; v1(104.9,-81.516) 104.138,-80.754 102.334,-80.754 102.308,-80.78 99.058,-80.78
D12-1: D12.5 K104.3 VD98.A | length 15.7
  Top Layer w0.3: K104.3@105.384,-83.592 106.859,-82.116 108.156,-82.116 108.887,-81.386 110.005,-81.386 110.096,-81.477 110.318,-81.477 110.768,-81.027 D12.5@111.543,-81.027
  Bottom Layer w0.3: VD98.A@102.067,-77.853 103.115,-77.852 104.112,-78.849 104.112,-79.881 104.998,-80.766 105.21,-80.766 105.754,-81.31 105.754,-82.019 105.402,-82.37 ; K104.3@105.384,-83.592 105.384,-82.456 ; 105.384,-82.456 105.298,-82.37 105.402,-82.37 ; 105.384,-82.456 105.384,-82.388 105.402,-82.37
D12-2: D12.6 K95.3 VD99.A | length 37
  Top Layer w0.3: v1(107.186,-83.548) 108.018,-82.716 108.405,-82.716 109.135,-81.986 109.757,-81.986 110.384,-82.613 110.701,-82.297 D12.6@111.543,-82.297
  Bottom Layer w0.3: K95.3@82.857,-83.592 82.857,-84.882 83.175,-85.199 92.784,-85.199 94.79,-83.193 96.137,-83.193 97.559,-81.77 100.639,-81.77 ; v1(107.186,-83.548) 106.596,-84.138 106.596,-84.421 105.975,-85.042 104.676,-85.042 102.821,-83.186 VD99.A@102.068,-83.187 VD99.A@102.055,-83.186 ; 100.639,-81.77 VD99.A@102.055,-83.186 ; 100.639,-81.77 101.166,-81.77 102.055,-82.659 VD99.A@102.055,-83.186
D12-3: D12.7 K103.3 VD100.A | length 23.1
  Top Layer w0.3: v1(109.446,-82.736) 110.277,-83.567 D12.7@111.543,-83.567
  Signal Layer 2 w0.3: K103.3@98.223,-83.592 98.223,-84.882 98.541,-85.199 106.982,-85.199 v1(109.446,-82.736)
  Bottom Layer w0.3: K103.3@98.223,-83.592 98.223,-85.61 100.88,-88.266 VD100.A@102.068,-88.267
D12-4: D12.14 K94.3 VD101.A | length 36.1
  Top Layer w0.3: D12.14@116.543,-78.487 117.135,-78.487 120.382,-81.733 120.382,-82.325 121.648,-83.592 K94.3@122.275,-83.592
  Bottom Layer w0.3: K94.3@122.275,-83.592 120.397,-83.592 ; VD101.A@125.435,-72.519 124.534,-72.518 123.931,-71.915 121.587,-71.915 121.003,-72.499 121.003,-75.674 121.816,-76.487 122.553,-76.487 123.467,-77.402 123.467,-79.321 122.826,-79.962 122.478,-79.962 ; 119.321,-83.283 120.087,-83.283 120.397,-83.592 ; 119.321,-83.283 118.882,-82.843 118.882,-82.222 119.321,-81.782 119.942,-81.782 ; 119.321,-83.283 119.63,-83.592 120.397,-83.592 ; 119.942,-81.782 120.092,-81.932 120.507,-81.932 122.478,-79.962 ; 119.942,-81.782 120.657,-81.782 122.478,-79.962
D12-5: D12.13 K102.3 VD102.A | length 27.1
  Top Layer w0.3: D12.13@116.543,-79.757 117.135,-79.757 117.919,-80.54 117.919,-80.819 v1(119.632,-82.532)
  Bottom Layer w0.3: v1(119.632,-82.532) 120.755,-82.532 121.104,-82.532 123.075,-80.562 124.285,-79.351 124.285,-78.716 124.549,-78.452 124.835,-78.452 VD102.A@125.436,-77.853 126.363,-77.852 129.595,-81.085 135.888,-81.085 136.571,-81.768 K102.3@136.571,-83.592
D12-6: D12.12 K93.3 VD103.A | length 34.6
  Top Layer w0.3: D12.12@116.543,-81.027 117.135,-81.027 117.919,-81.81 117.919,-82.232 120.902,-85.215 v2(120.902,-85.835)
  Bottom Layer w0.3: v2(120.902,-85.835) 120.902,-85.732 121.156,-85.478 121.258,-85.58 ; 121.156,-85.58 121.258,-85.58 ; K93.3@144.056,-83.592 144.056,-84.882 143.509,-85.428 128.471,-85.428 126.229,-83.186 VD103.A@125.435,-83.187 124.835,-83.786 124.549,-83.786 124.204,-84.132 124.204,-84.983 123.352,-85.834 121.512,-85.834 121.258,-85.58
D12-7: D12.11 K101.3 VD104.A | length 25.1
  Top Layer w0.3: D12.11@116.543,-82.297 117.023,-82.297 117.543,-82.817 117.655,-82.817 118.616,-83.777 118.616,-84.31 v1(119.124,-84.818)
  Bottom Layer w0.3: v1(119.124,-84.818) v1@119.183,-84.878 ; 122.934,-84.974 122.866,-85.042 ; VD104.A@125.436,-88.775 124.439,-88.774 122.515,-86.851 121.41,-86.851 121.194,-86.635 120.57,-86.635 120.102,-86.166 120.102,-85.796 v1@119.183,-84.878 ; K101.3@129.197,-83.592 127.955,-83.592 126.49,-82.126 124.102,-82.126 123.604,-82.624 123.604,-84.304 122.866,-85.042 ; v1@119.183,-84.878 121.52,-84.878 121.684,-85.042 122.866,-85.042
D13-0: D13.4 K108.3 VD105.A | length 34.9
  Top Layer w0.3: v1(107.186,-56.878) 111.489,-56.878 D13.4@111.543,-56.933
  Bottom Layer w0.3: K108.3@90.462,-60.514 90.462,-59.455 91.946,-57.971 97.961,-57.971 ; 100.327,-55.604 97.961,-57.971 ; VD105.A@102.068,-50.167 101.468,-50.766 101.181,-50.766 100.918,-51.03 100.918,-53.831 101.09,-53.831 100.836,-54.085 ; v1(107.186,-56.878) 105.941,-56.878 105.935,-56.884 104.753,-56.884 103.218,-55.349 103.218,-54.864 102.954,-54.601 101.352,-54.601 100.836,-54.085 ; 97.961,-57.971 98.067,-57.971 99.413,-56.624 99.413,-56.519 100.58,-55.353 100.327,-55.1 100.836,-54.591 100.836,-54.085
D13-1: D13.5 K116.3 VD106.A | length 18.1
  Top Layer w0.3: K116.3@105.384,-60.514 107.695,-58.203 D13.5@111.543,-58.203
  Bottom Layer w0.3: VD106.A@102.067,-55.501 101.28,-55.5 100.912,-55.869 100.912,-56.756 100.024,-57.644 100.912,-58.531 100.912,-59.419 105.13,-59.419 105.384,-59.673 K116.3@105.384,-60.514
D13-2: D13.6 K107.3 VD107.A | length 37.3
  Top Layer w0.3: v1(108.075,-59.418) 111.489,-59.418 D13.6@111.543,-59.473
  Bottom Layer w0.3: K107.3@82.857,-60.514 82.857,-61.704 84.203,-63.051 92.682,-63.051 96.695,-59.037 100.08,-59.037 ; v1(108.075,-59.418) 108.075,-59.865 105.975,-61.964 104.793,-61.964 103.409,-60.58 VD107.A@101.623,-60.58 ; 100.08,-59.037 100.312,-59.269 100.312,-59.667 ; 100.08,-59.037 100.312,-59.037 100.312,-59.667 ; 100.312,-59.667 100.663,-60.019 ; 100.663,-60.019 101.061,-60.019 VD107.A@101.623,-60.58 ; 100.663,-60.019 101.623,-60.019 VD107.A@101.623,-60.58
D13-3: D13.7 K115.3 VD108.A | length 22.9
  Top Layer w0.3: v1(109.726,-60.688) 109.78,-60.743 D13.7@111.543,-60.743
  Signal Layer 2 w0.3: K115.3@98.223,-60.514 98.223,-61.704 98.96,-62.441 107.77,-62.441 109.522,-60.688 v1(109.726,-60.688)
  Bottom Layer w0.3: K115.3@98.223,-60.514 98.223,-62.775 101.109,-65.66 VD108.A@102.068,-65.661
D13-4: D13.14 K106.3 VD109.A | length 26.2
  Top Layer w0.3: D13.14@116.543,-55.663 117.672,-55.663 v1(118.235,-55.1)
  Bottom Layer w0.3: v1(118.235,-55.1) 118.997,-54.338 125.067,-54.338 126.591,-52.814 126.591,-50.592 ; VD109.A@125.436,-50.167 126.166,-50.166 126.591,-50.592 ; K106.3@129.197,-60.96 129.197,-59.164 127.76,-57.727 127.76,-56.167 127.76,-51.76 126.591,-50.592
D13-5: D13.13 K114.3 VD110.A | length 39.4
  Top Layer w0.3: D13.13@116.543,-56.933 118.01,-56.933 v1(118.412,-57.336)
  Bottom Layer w0.3: v1(118.412,-57.336) 122.934,-57.336 ; v1@118.616,-57.132 118.813,-57.33 123.31,-57.33 124.886,-55.754 VD110.A@125.722,-55.754 ; VD110.A@125.436,-55.755 126.586,-56.905 126.586,-59.89 126.585,-60.927 128.069,-62.41 128.669,-62.41 128.776,-62.517 143.56,-62.517 144.056,-62.022 K114.3@144.056,-60.96
D13-6: D13.12 K105.3 VD111.A | length 10.3
  Top Layer w0.3: D13.12@116.543,-58.203 119.518,-58.203 K105.3@122.275,-60.96
  Bottom Layer w0.3: K105.3@122.275,-60.96 122.909,-60.326 VD111.A@125.435,-60.327
D13-7: D13.11 K113.3 VD112.A | length 48.3
  Top Layer w0.3: D13.11@116.543,-59.473 v1(118.695,-59.473)
  Bottom Layer w0.3: v1(118.695,-59.473) 118.695,-61.784 121.476,-64.565 122.861,-64.565 123.302,-65.006 123.442,-65.006 124.096,-65.66 VD112.A@125.436,-65.661 126.826,-65.66 128.445,-64.041 143.508,-64.041 145.286,-62.263 145.286,-59.164 144.549,-58.428 137.307,-58.428 136.571,-59.164 K113.3@136.571,-60.96
D14-0: D14.4 K112.3 VD113.A | length 35.4
  Top Layer w0.3: v1(109.218,-34.109) D14.4@111.543,-34.109
  Bottom Layer w0.3: K112.3@90.462,-37.436 90.462,-36.685 92.765,-36.685 92.784,-36.704 VD113.A@94.956,-36.705 95.556,-37.304 95.842,-37.304 96.105,-37.568 96.105,-39.956 97.391,-41.242 97.592,-41.041 98.774,-41.041 98.779,-41.046 98.814,-41.046 99.435,-41.667 99.435,-43.286 100.38,-44.231 103.578,-44.231 104.132,-43.676 104.132,-41.662 104.753,-41.041 106.513,-41.041 109.218,-38.336 v1(109.218,-34.109) v1@109.218,-34.018
D14-1: D14.5 K120.3 VD114.A | length 15.2
  Top Layer w0.3: K120.3@105.384,-37.436 107.441,-35.379 D14.5@111.543,-35.379
  Bottom Layer w0.3: VD114.A@102.068,-31.117 102.937,-31.116 103.68,-31.859 103.68,-33.763 105.384,-35.466 K120.3@105.384,-37.436
D14-2: D14.6 K111.3 VD115.A | length 36.4
  Top Layer w0.3: v1(106.932,-38.336) 108.619,-36.649 D14.6@111.543,-36.649
  Bottom Layer w0.3: K111.3@82.857,-37.436 82.857,-36.304 84.178,-34.984 100.258,-34.984 ; v1(106.932,-38.336) 106.525,-38.336 105.975,-38.886 104.793,-38.886 103.211,-37.304 102.668,-37.304 ; 100.258,-34.984 VD115.A@101.979,-36.704 ; 100.258,-34.984 100.658,-34.984 101.979,-36.304 VD115.A@101.979,-36.704 ; VD115.A@101.979,-36.704 VD115.A@102.068,-36.705 ; VD115.A@102.068,-36.705 102.668,-37.304 ; VD115.A@102.068,-36.705 102.668,-37.304
D14-3: D14.7 K119.3 VD116.A | length 24.9
  Top Layer w0.3: D14.7@111.543,-37.919 112.407,-37.919 v1(113.028,-38.54)
  Signal Layer 2 w0.3: K119.3@98.223,-37.436 98.223,-37.447 100.048,-37.447 101.674,-35.822 110.31,-35.822 v1(113.028,-38.54)
  Bottom Layer w0.3: K119.3@98.223,-37.436 98.223,-39.124 100.63,-41.53 VD116.A@102.068,-41.531
D14-4: D14.14 K110.3 VD117.A | length 19.2
  Top Layer w0.3: D14.14@116.543,-32.839 118.96,-32.839 v1(119.378,-33.256)
  Bottom Layer w0.3: v1(119.378,-33.256) 119.575,-33.454 123.538,-33.454 ; VD117.A@125.435,-31.117 124.616,-31.116 123.873,-31.859 123.873,-33.51 ; K110.3@129.197,-37.084 129.197,-35.987 128.854,-35.644 125.728,-35.644 124.87,-34.786 123.873,-33.79 ; 123.538,-33.454 123.873,-33.79 ; 123.538,-33.454 123.817,-33.454 123.873,-33.51 ; 123.873,-33.79 123.873,-33.51
D14-5: D14.13 K118.3 VD118.A | length 34.4
  Top Layer w0.3: D14.13@116.543,-34.109 v1(118.452,-34.109)
  Bottom Layer w0.3: v1(118.452,-34.109) v1@118.616,-34.272 ; K118.3@144.056,-37.084 144.056,-35.669 143.675,-35.288 134.694,-35.288 131.138,-38.844 128.503,-38.844 126.363,-36.704 VD118.A@125.436,-36.705 123.936,-36.704 122.866,-35.634 119.978,-35.634 ; v1@118.616,-34.272 119.977,-35.634 ; v1@118.616,-34.272 119.978,-35.634
D14-6: D14.12 K109.3 VD119.A | length 13
  Top Layer w0.3: D14.12@116.543,-35.379 120.57,-35.379 K109.3@122.275,-37.084
  Bottom Layer w0.3: K109.3@122.275,-37.084 122.275,-39.602 124.458,-41.784 VD119.A@125.436,-41.785
D14-7: D14.11 K117.3 VD120.A | length 28.9
  Top Layer w0.3: D14.11@116.543,-36.649 118.387,-36.649 v1(120.404,-38.667)
  Signal Layer 2 w0.3: v1(120.404,-38.667) 135.55,-38.667 136.282,-37.934 136.571,-37.934 K117.3@136.571,-37.084
  Bottom Layer w0.3: VD120.A@133.056,-41.785 134.342,-41.784 136.571,-39.556 K117.3@136.571,-37.084
D15-0: D15.4 K124.3 VD121.A | length 20.3
  Top Layer w0.3: K124.3@105.384,-14.358 107.996,-11.747 109.269,-11.747 109.984,-11.031 D15.4@111.543,-11.031
  Bottom Layer w0.3: VD121.A@102.068,-3.431 102.868,-3.43 103.818,-4.381 103.818,-9.793 104.421,-10.397 105.384,-11.36 K124.3@105.384,-14.358
D15-1: D15.5 K132.3 VD122.A | length 29.6
  Top Layer w0.3: v1(109.218,-12.682) 111.162,-12.682 D15.5@111.543,-12.301 112.926,-12.301 v1(113.561,-12.936)
  Signal Layer 2 w0.3: v1(113.561,-12.936) 121.918,-12.936 122.275,-13.294 K132.3@122.275,-14.358
  Bottom Layer w0.3: VD122.A@102.067,-8.257 102.216,-8.256 102.668,-8.708 ; v1(109.218,-12.682) 109.101,-12.682 105.975,-15.808 104.793,-15.808 103.976,-14.991 103.976,-12.434 103.818,-12.276 103.818,-10.642 103.218,-10.042 103.218,-9.12 102.954,-8.856 102.816,-8.856 ; 102.668,-8.708 102.668,-8.856 102.816,-8.856 ; 102.668,-8.708 102.816,-8.856
D15-2: D15.6 K123.3 VD123.A | length 30.5
  Top Layer w0.3: v1(109.726,-13.698) 109.853,-13.571 D15.6@111.543,-13.571
  Bottom Layer w0.3: K123.3@90.462,-14.358 90.462,-13.176 91.438,-12.2 100.963,-12.2 101.623,-12.86 101.623,-13.59 VD123.A@101.919,-13.59 ; VD123.A@102.068,-13.591 VD123.A@101.919,-13.59 ; v1(109.726,-13.698) 109.472,-13.698 105.916,-17.255 101.852,-17.255 100.328,-15.73 100.328,-15.044 101.181,-14.19 101.468,-14.19 101.468,-14.042 VD123.A@101.919,-13.59
D15-3: D15.7 K131.3 VD124.A | length 25.2
  Top Layer w0.3: v2(109.808,-14.841) D15.7@111.543,-14.841
  Signal Layer 2 w0.3: K131.3@98.223,-14.358 98.223,-13.288 99.058,-12.454 107.42,-12.454 ; v2@109.827,-14.841 v2(109.808,-14.841) 108.976,-14.009 ; 107.42,-12.454 107.44,-12.454 108.976,-13.99 108.976,-14.009 ; 107.42,-12.454 108.976,-14.009
  Bottom Layer w0.3: K131.3@98.223,-14.358 98.223,-17.176 99.718,-18.67 VD124.A@102.068,-18.671
D15-4: D15.14 K122.3 VD125.A | length 21.7
  Top Layer w0.3: D15.14@116.543,-9.761 119.711,-9.761 121.644,-7.829 122.826,-7.829 124.204,-9.206 v1(124.204,-11.158)
  Bottom Layer w0.3: VD125.A@125.435,-8.257 124.705,-8.257 124.28,-8.682 124.28,-11.082 v1(124.204,-11.158) 127.023,-11.158 129.197,-13.332 K122.3@129.197,-14.358
D15-5: D15.13 K130.3 VD126.A | length 25.4
  Top Layer w0.3: D15.13@116.543,-11.031 119.886,-11.031 120.182,-11.328 v1(120.986,-11.328)
  Bottom Layer w0.3: v1(120.986,-11.328) 122.426,-11.328 124.688,-13.591 VD126.A@125.436,-13.591 126.426,-13.59 127.748,-14.912 127.748,-14.975 ; K130.3@136.571,-14.358 136.571,-15.507 135.888,-16.19 128.963,-16.19 ; 127.748,-14.975 128.962,-16.19 ; 127.748,-14.975 128.963,-16.19
D15-6: D15.12 K121.3 VD127.A | length 124.2
  Top Layer w0.3: D15.12@116.543,-12.301 118.177,-12.301 120.556,-14.68 120.556,-16.412 120.907,-16.764 124.729,-16.764 v1(125.474,-17.508)
  Bottom Layer w0.3: v1(125.474,-17.508) 125.474,-18.886 VD127.A@125.435,-18.925 127.074,-18.924 128.439,-17.559 145.133,-17.559 151.856,-10.836 166.124,-10.836 169.79,-7.171 171.183,-7.171 172.222,-8.209 172.222,-8.421 172.661,-8.861 173.282,-8.861 173.722,-8.421 173.722,-8.209 ; K121.3@220.913,-14.358 220.913,-11.819 216.265,-7.171 184.158,-7.171 ; 173.722,-8.209 174.76,-7.171 ; 173.722,-8.209 174.76,-7.171 ; 174.76,-7.171 177.603,-7.171 ; 177.603,-7.171 177.661,-7.229 ; 177.603,-7.171 177.661,-7.229 ; 177.661,-7.229 179.675,-7.229 180.623,-8.177 181.332,-8.177 182.322,-7.186 ; 182.322,-7.186 184.142,-7.186 184.158,-7.171 ; 182.322,-7.186 182.338,-7.171 184.158,-7.171
D15-7: D15.11 K129.3 VD128.A | length 50.3
  Top Layer w0.3: D15.11@116.543,-13.571 118.209,-13.571 119.956,-15.318 119.956,-16.661 120.658,-17.364 123.11,-17.364 124.208,-18.461 125.581,-18.461 126.224,-17.819 126.224,-16.758 125.958,-16.493 v1(125.728,-16.493)
  Bottom Layer w0.3: v1(125.728,-16.493) 125.372,-16.493 125.106,-16.758 ; VD128.A@133.056,-18.925 132.211,-18.924 129.614,-21.522 126.425,-21.522 126.322,-21.625 124.549,-21.625 124.446,-21.522 124.28,-21.522 124.28,-17.585 125.106,-16.758 ; K129.3@144.056,-14.358 144.056,-14.333 138.758,-14.333 136.218,-16.873 126.109,-16.873 125.994,-16.758 125.106,-16.758
D16-0: D16.4 K128.3 VD129.A | length 31.8
  Top Layer w0.3: K128.3@163.379,-14.358 170.509,-7.229 179.709,-7.229 183.513,-11.031 D16.4@185.966,-11.031
  Bottom Layer w0.3: K128.3@163.379,-14.358 163.379,-14.038 164.011,-13.406 ; VD129.A@167.346,-13.337 164.08,-13.336 ; 164.011,-13.406 164.011,-13.336 164.08,-13.336 ; 164.011,-13.406 164.08,-13.336
D16-1: D16.5 K136.3 VD130.A | length 22.1
  Top Layer w0.3: K136.3@178.875,-14.358 179.487,-13.747 179.487,-13.509 179.045,-13.509 177.96,-12.423 177.96,-10.444 177.623,-10.108 177.623,-8.449 178.244,-7.829 179.426,-7.829 183.899,-12.301 D16.5@185.966,-12.301
  Bottom Layer w0.3: VD130.A@174.966,-13.845 176.153,-13.844 176.172,-13.825 178.875,-13.825 K136.3@178.875,-14.358
D16-2: D16.6 K127.3 VD131.A | length 125.8
  Top Layer w0.3: v1(183.259,-12.936) 183.259,-13.127 183.703,-13.571 D16.6@185.966,-13.571
  Signal Layer 2 w0.3: 181.1,-10.905 181.1,-10.777 ; v1(181.1,-7.348) 181.1,-10.777 ; v1(183.259,-12.936) 181.1,-10.777
  Bottom Layer w0.3: K127.3@155.232,-14.358 155.232,-14.587 147.561,-22.258 124.458,-22.258 124.424,-22.225 124.301,-22.225 124.198,-22.122 124.031,-22.122 123.68,-21.77 123.68,-21.48 123.67,-21.471 123.67,-13.712 122.374,-12.417 122.369,-12.417 121.93,-11.977 121.397,-11.977 121.296,-12.078 120.675,-12.078 120.236,-11.639 120.236,-11.018 121.023,-10.23 121.023,-8.449 121.644,-7.829 122.962,-7.829 123.95,-6.841 126.49,-6.841 126.744,-7.095 127.607,-7.095 128.014,-7.501 147.165,-7.501 147.978,-8.314 153.414,-8.314 155.674,-6.053 171.727,-6.053 174.096,-3.684 VD131.A@174.965,-3.685 175.566,-4.284 175.852,-4.284 176.116,-4.548 176.116,-4.835 177.91,-6.629 180.38,-6.629 v1(181.1,-7.348)
D16-3: D16.7 K135.3 VD132.A | length 91.6
  Top Layer w0.3: K135.3@171.065,-14.358 171.065,-15.094 173.934,-17.964 185.975,-17.964 187.358,-16.581 187.358,-15.642 186.557,-14.841 D16.7@185.966,-14.841
  Bottom Layer w0.3: K135.3@171.065,-14.358 171.065,-14.13 172.495,-14.13 173.681,-12.945 175.852,-12.945 176.047,-13.14 177.95,-13.14 180.135,-10.955 ; VD132.A@174.966,-9.019 175.975,-9.018 176.629,-8.364 ; 176.629,-8.364 176.629,-8.339 177.163,-7.806 177.188,-7.806 ; 176.629,-8.364 177.188,-7.806 ; 177.188,-7.806 177.39,-7.806 177.412,-7.829 179.426,-7.829 180.374,-8.777 181.581,-8.777 182.551,-7.806 198.435,-7.806 198.803,-8.174 198.803,-10.083 198.158,-10.728 193.258,-10.728 193.032,-10.955 192.411,-10.955 ; 180.135,-10.955 180.185,-10.904 192.361,-10.904 192.411,-10.955 ; 180.135,-10.955 192.411,-10.955
D16-4: D16.14 K126.3 VD133.A | length 13.1
  Top Layer w0.3: D16.14@190.966,-9.761 192.104,-9.761 192.473,-9.392 193.094,-9.392 193.534,-9.832 193.534,-10.285 K126.3@197.607,-14.358
  Bottom Layer w0.3: K126.3@197.607,-14.358 197.607,-14.587 199.242,-14.587 199.261,-14.606 VD133.A@201.351,-14.607
D16-5: D16.13 K134.3 VD134.A | length 30.2
  Top Layer w0.3: D16.13@190.966,-11.031 191.486,-11.551 192.077,-11.551 192.401,-11.876 v1(192.491,-11.876)
  Bottom Layer w0.3: v1(192.491,-11.876) 192.535,-11.92 197.815,-11.92 200.463,-9.272 202.626,-9.272 203.44,-10.086 ; K134.3@213.103,-14.358 213.103,-13.114 212.723,-12.733 206.087,-12.733 ; 203.44,-10.086 203.44,-10.2 205.973,-12.733 206.087,-12.733 ; 203.44,-10.086 206.087,-12.733
D16-6: D16.12 K125.3 VD135.A | length 127.4
  Top Layer w0.3: v1(188.212,-12.682) 188.72,-12.682 189.101,-12.301 D16.12@190.966,-12.301 191.557,-12.301 192.341,-13.085 192.341,-13.093 v2(192.692,-13.444)
  Signal Layer 2 w0.3: K125.3@82.857,-14.358 82.857,-13.508 83.228,-13.508 84.918,-11.819 120.415,-11.819 120.675,-12.078 121.296,-12.078 121.556,-11.819 123.409,-11.819 123.498,-11.909 123.588,-11.819 123.803,-11.819 123.893,-11.909 124.514,-11.909 124.604,-11.819 178.915,-11.819 181.811,-14.714 ; 183.386,-14.714 181.811,-14.714 ; v1(188.212,-12.682) 186.159,-14.735 181.832,-14.735 181.811,-14.714
  Bottom Layer w0.3: v2(192.692,-13.444) 194.031,-13.444 200.527,-19.941 VD135.A@201.351,-19.941
D16-7: D16.11 K133.3 VD136.A | length 26.1
  Top Layer w0.3: v1(189.405,-13.952) 189.786,-13.571 D16.11@190.966,-13.571
  Signal Layer 2 w0.3: v1(189.405,-13.952) 190.929,-12.428 191.723,-12.428 ; K133.3@205.417,-14.358 205.417,-12.809 205.036,-12.428 193.082,-12.428 ; 191.723,-12.428 191.965,-12.671 192.335,-12.671 192.361,-12.644 192.866,-12.644 193.082,-12.428 ; 191.723,-12.428 191.893,-12.428 192.091,-12.626 192.801,-12.626 192.999,-12.428 193.082,-12.428
  Bottom Layer w0.3: K133.3@205.417,-14.358 205.417,-14.587 207.217,-14.587 207.236,-14.606 VD136.A@209.51,-14.607
D17-0: D17.4 K140.3 VD137.A | length 32.4
  Top Layer w0.3: v1(180.846,-31.478) 183.259,-33.892 D17.4@185.966,-33.892
  Bottom Layer w0.3: K140.3@163.379,-37.436 163.379,-34.78 168.433,-29.726 171.448,-29.726 173.353,-27.821 173.353,-26.925 173.988,-26.29 VD137.A@175.22,-26.291 175.658,-26.29 v1(180.846,-31.478)
D17-1: D17.5 K148.3 VD138.A | length 22.5
  Top Layer w0.3: K148.3@178.875,-37.436 181.15,-35.162 D17.5@185.966,-35.162
  Bottom Layer w0.3: VD138.A@166.838,-36.705 168.857,-36.704 170.654,-34.907 177.478,-34.907 178.875,-36.304 K148.3@178.875,-37.436
D17-2: D17.6 K139.3 VD139.A | length 62.1
  Top Layer w0.3: v1(184.402,-36.432) D17.6@185.966,-36.432
  Signal Layer 2 w0.3: K139.3@155.232,-37.436 155.232,-36.304 157.391,-34.145 182.116,-34.145 v1(184.402,-36.432)
  Bottom Layer w0.3: K139.3@155.232,-37.436 155.232,-38.63 155.573,-38.971 164.107,-38.971 164.869,-38.209 164.869,-34.139 168.241,-30.767 174.292,-30.767 VD139.A@175.512,-31.987 ; VD139.A@174.775,-31.624 VD139.A@175.22,-31.625
D17-3: D17.7 K147.3 VD140.A | length 23
  Top Layer w0.3: v1(182.065,-37.066) 183.335,-37.066 183.97,-37.702 D17.7@185.966,-37.702
  Signal Layer 2 w0.3: K147.3@171.065,-37.436 171.065,-37.447 176.528,-37.447 178.864,-35.111 180.109,-35.111 v1(182.065,-37.066)
  Bottom Layer w0.3: K147.3@171.065,-37.436 171.065,-38.437 171.448,-38.819 172.337,-38.819 174.197,-36.958 VD140.A@175.219,-36.959